# EAGLE board Joystickv-Panel-v03 (EAGLE 7.2.0)
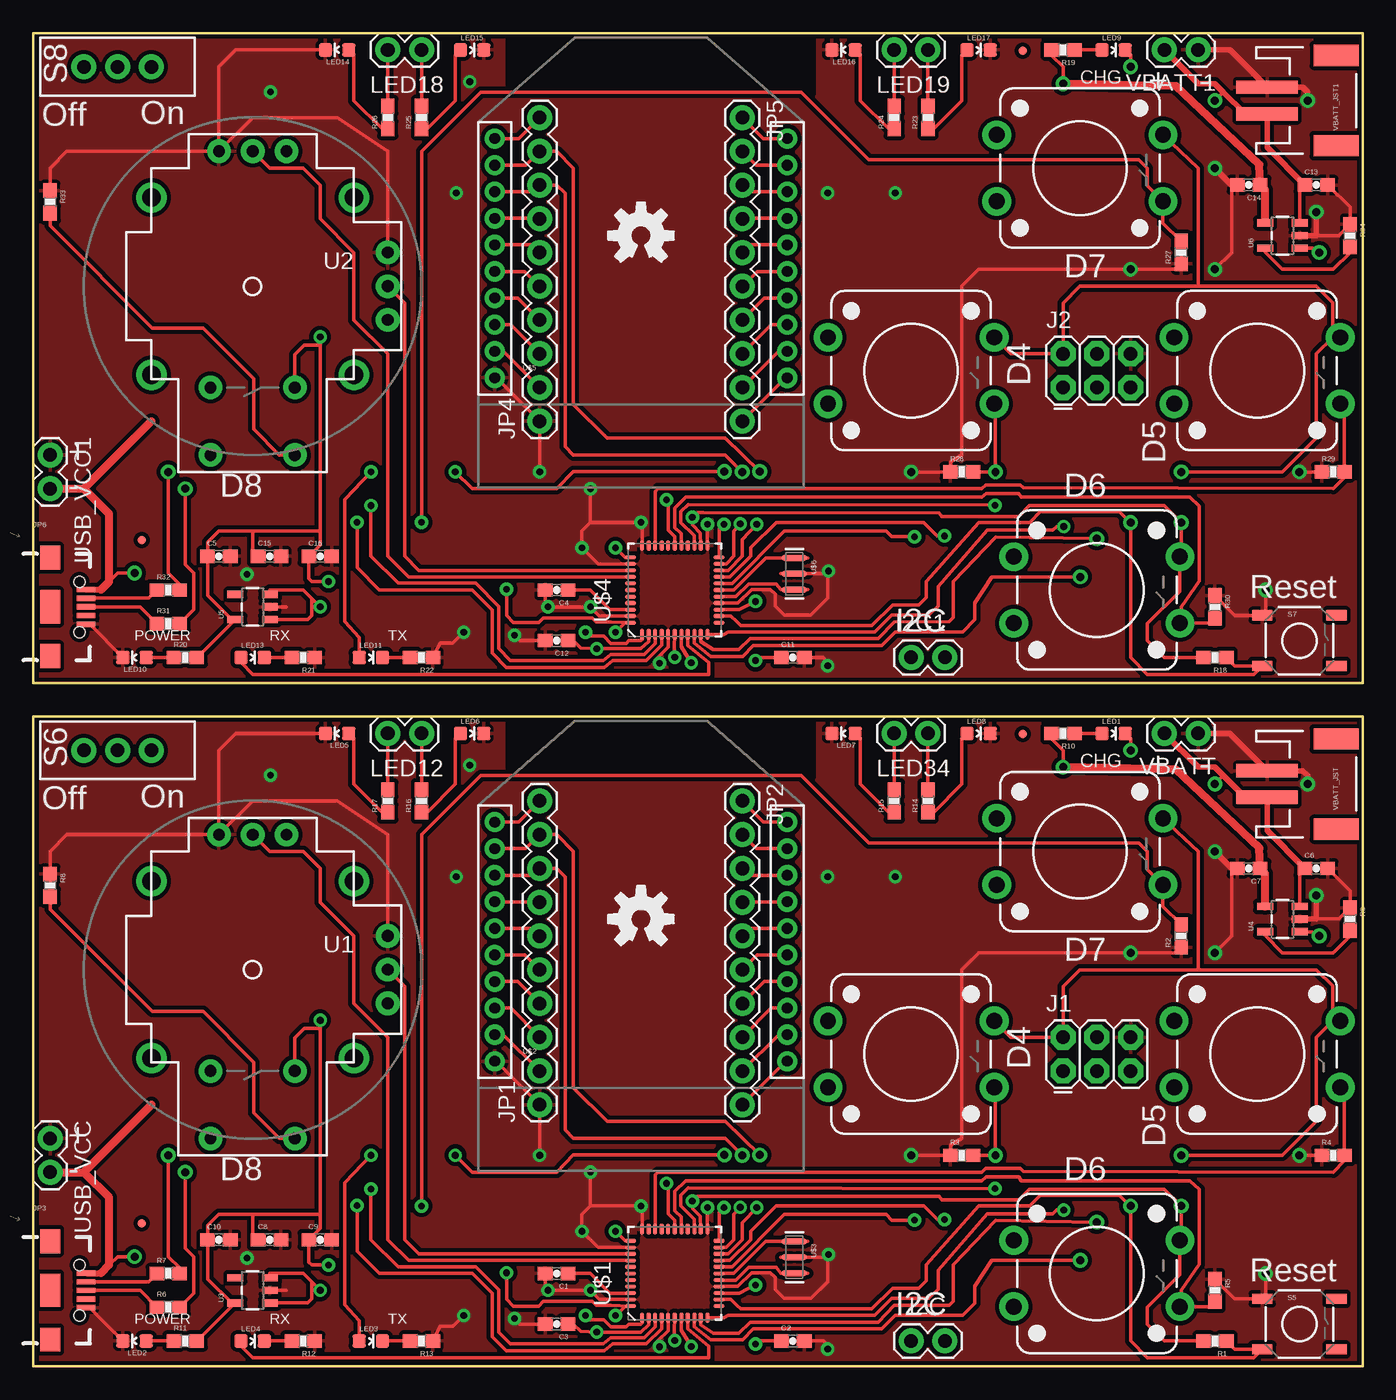
[diagram p0: board, top side]
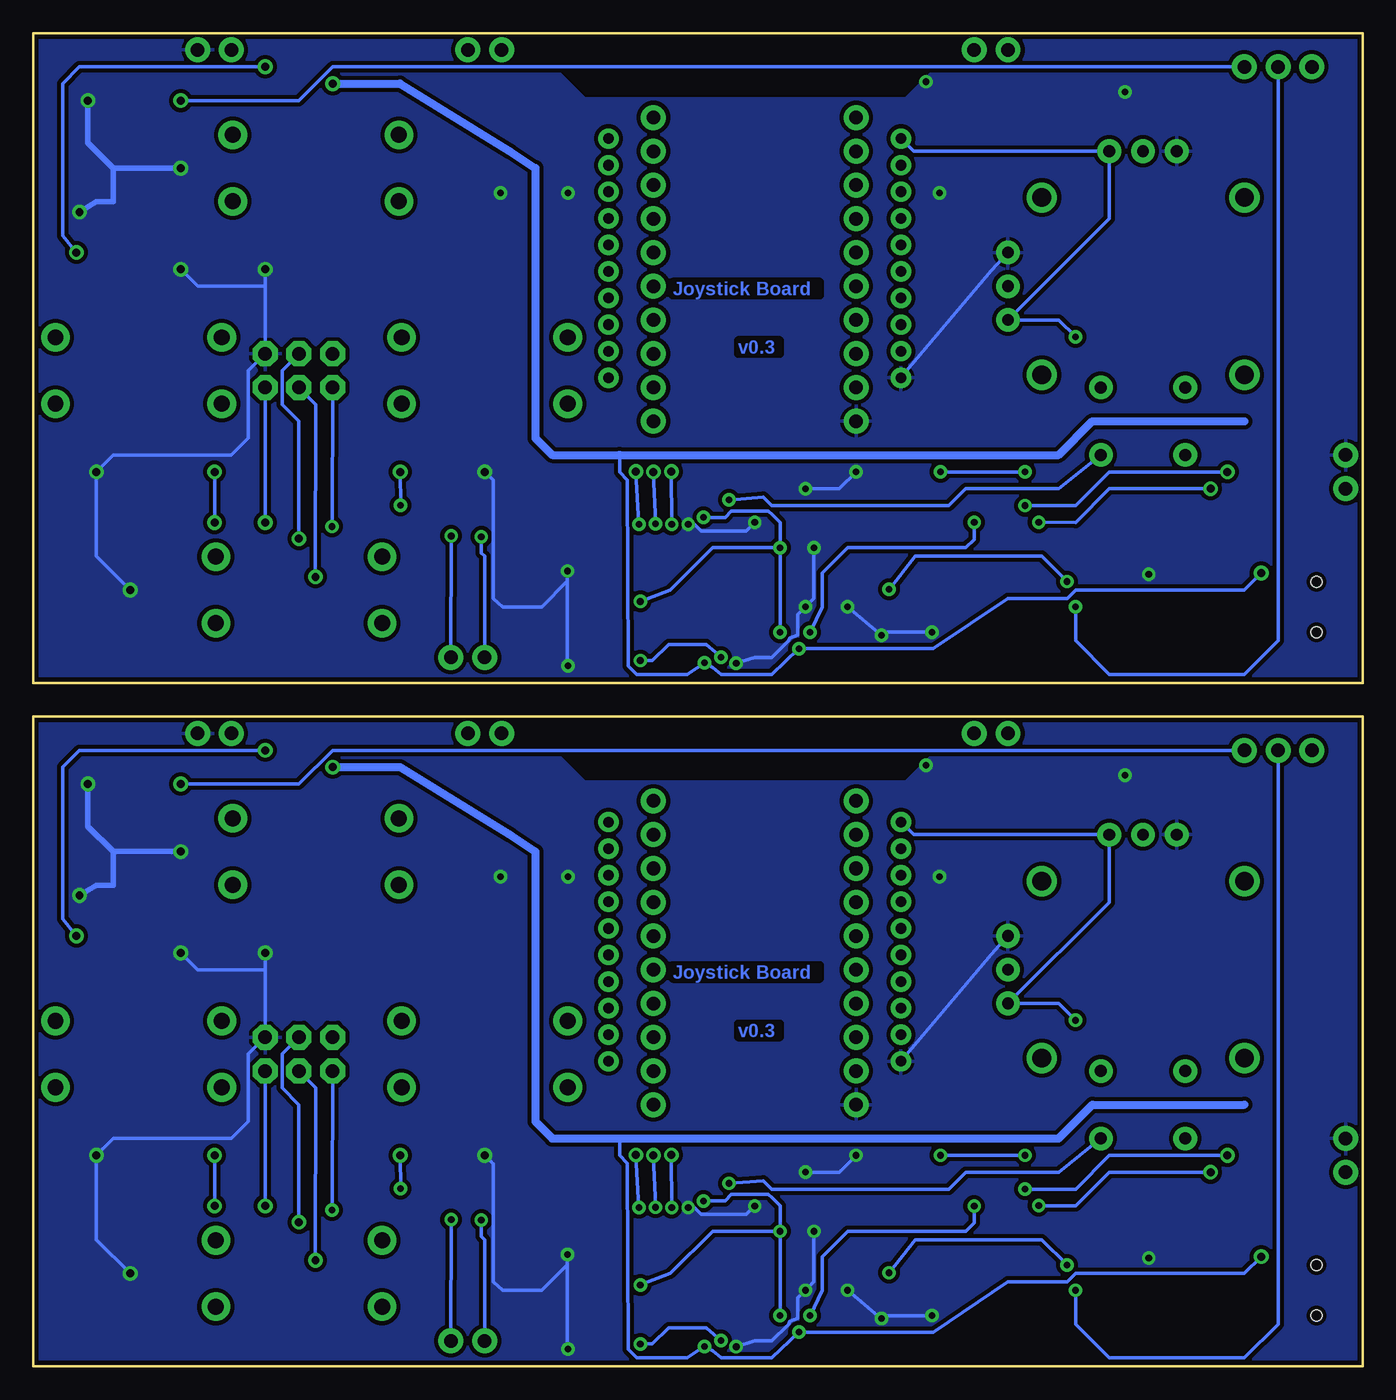
[diagram p1: board, bottom side, seen from below]

Size 100 x 100.32 mm. Coordinates in mm from the lower left corner, seen from the top.
Outline: 0,0 100,0 100,48.89 0,48.89 0,0
Outline: 0,51.44 100,51.44 100,100.32 0,100.32 0,51.44
Copper layers (1*16): Top 0.035mm / dielectric 1.5mm / Bottom 0.035mm
Design rules "SparkFun-2-layer *": minimum track width 7mil, minimum drill 15mil, track to track 6mil, track to pad 8mil, pad to pad 8mil, via to via 8mil, smd to smd 8mil, copper to edge 8mil, drill to drill 8mil, minimum pad ring 12mil, minimum via ring 10mil, stop-mask expansion 4mil, vias tented up to drill 20mil, thermal gap 10mil

## Footprints (pad centres in the part's own frame; a part is rotated, then mirrored left to right if it is on the bottom)
0603-CAP = smd 1.1 x 1: 1 -0.85,0; 2 0.85,0
MICRO-FIDUCIAL = smd 0.635 x 0.635: 1 0,0
1X02 = drill 1.016 pad 1.88: 1 0,0; 2 2.54,0
2X3 = drill 1.016 pad 1.88 octagon: 1 0,0; 2 0,2.54; 3 2.54,0; 4 2.54,2.54; 5 5.08,0; 6 5.08,2.54
1X10 = drill 1.016 pad 1.88: 1 0,0; 2 2.54,0; 3 5.08,0; 4 7.62,0; 5 10.16,0; 6 12.7,0; 7 15.24,0; 8 17.78,0; 9 20.32,0; 10 22.86,0
USB-B-MICRO-SMD_V03 = smd 1.4 x 0.4: D+1 2.7,0; D-1 2.7,0.65; GND1 2.7,-1.3; ID1 2.7,-0.65; VBUS1 2.7,1.3 | smd 1.5 x 1.8: SHIELD1 0,3.7; SHIELD2 0,-3.7 | smd 1.5 x 2.5: SHIELD3 0,0 | hole 0.85: 2.2,1.9; 2.2,-1.9
LED-0603 = smd 1 x 1: A 0,-0.877; C 0,0.877
0603-RES = smd 1.1 x 1: 1 -0.85,0; 2 0.85,0
TACTILE-PTH-12MM = drill 1.2 pad 2.159: 1 6.25,-2.5; 2 -6.25,-2.5; 3 6.25,2.5; 4 -6.25,2.5
TACTILE-SWITCH-SMD = smd 1.524 x 0.762: 1 -2.794,1.905; 2 2.794,1.905; 3 -2.794,-1.905; 4 2.794,-1.905
SWITCH-SPDT = drill 1.016 pad 1.88: 1 0,2.54; 2 0,0; 3 0,-2.54
JOYSTICK = drill 0.9 pad 1.778: B1A -3.175,12.7; B1B 3.175,12.7; B2A -3.175,7.62; B2B 3.175,7.62 | drill 0.889 pad 1.778: H1 -2.54,-10.16; H2 0,-10.16; H3 2.54,-10.16; V1 -10.16,2.54; V2 -10.16,0; V3 -10.16,-2.54 | drill 1.397 pad 2.286: MOUNT1 -7.62,6.668; MOUNT2 -7.62,-6.668; MOUNT3 7.62,-6.668; MOUNT4 7.62,6.668
SOT23-5 = smd 0.55 x 1.2: 1 -0.95,-1.3; 2 0,-1.3; 3 0.95,-1.3; 4 0.95,1.3; 5 -0.95,1.3
QFN-44-NOPAD_1:1-LESS_PASTE = smd 0.8 x 0.3: 1 -3.337,2.458; 2 -3.337,1.958; 3 -3.337,1.479; 4 -3.337,0.979; 5 -3.337,0.5; 6 -3.337,0; 7 -3.337,-0.5; 8 -3.337,-0.979; 9 -3.337,-1.479; 10 -3.337,-1.958; 11 -3.337,-2.458; 23 3.337,-2.458; 24 3.337,-1.958; 25 3.337,-1.479; 26 3.337,-0.979; 27 3.337,-0.5; 28 3.337,0; 29 3.337,0.5; 30 3.337,0.979; 31 3.337,1.479; 32 3.337,1.958; 33 3.337,2.458 | smd 0.3 x 0.8: 12 -2.458,-3.337; 13 -1.958,-3.337; 14 -1.479,-3.337; 15 -0.979,-3.337; 16 -0.5,-3.337; 17 0,-3.337; 18 0.5,-3.337; 19 0.979,-3.337; 20 1.479,-3.337; 21 1.958,-3.337; 22 2.458,-3.337; 34 2.458,3.337; 35 1.958,3.337; 36 1.479,3.337; 37 0.979,3.337; 38 0.5,3.337; 39 0,3.337; 40 -0.5,3.337; 41 -0.979,3.337; 42 -1.479,3.337; 43 -1.958,3.337; 44 -2.458,3.337
XBEE-1 = drill 0.8 pad 1.524: 1 -11,20; 2 -11,18; 3 -11,16; 4 -11,14; 5 -11,12; 6 -11,10; 7 -11,8; 8 -11,6; 9 -11,4; 10 -11,2; 11 11,2; 12 11,4; 13 11,6; 14 11,8; 15 11,10; 16 11,12; 17 11,14; 18 11,16; 19 11,18; 20 11,20
RESONATOR-SMD = smd 0.45 x 1.905: 1 -1.2,0; 2 0,0; 3 1.2,0
JST-2-SMD = smd 1 x 4.6: 1 -1,-3.7; 2 1,-3.7 | smd 1.6 x 3.4: NC1 -3.4,1.5; NC2 3.4,1.5

## Placement (x,y rotation side)
C1  0.1uF  [0603-CAP]  39.37,6.99 180 top
C2  1.0uF  [0603-CAP]  57.15,1.91 0 top
C3  1.0uF  [0603-CAP]  39.37,3.17 180 top
C4  0.1uF  [0603-CAP]  39.37,58.42 180 top
C5  0.1uF  [0603-CAP]  13.97,60.96 0 top
C6  10uF  [0603-CAP]  96.52,37.46 0 top
C7  4.7uF  [0603-CAP]  91.44,37.46 180 top
C8  10uF  [0603-CAP]  17.78,9.52 0 top
C9  1.0uF  [0603-CAP]  21.59,9.52 0 top
C10  0.1uF  [0603-CAP]  13.97,9.52 0 top
C11  1.0uF  [0603-CAP]  57.15,53.34 0 top
C12  1.0uF  [0603-CAP]  39.37,54.61 180 top
C13  10uF  [0603-CAP]  96.52,88.9 0 top
C14  4.7uF  [0603-CAP]  91.44,88.9 180 top
C15  10uF  [0603-CAP]  17.78,60.96 0 top
C16  1.0uF  [0603-CAP]  21.59,60.96 0 top
FID1  FIDUCIALUFIDUCIAL  [MICRO-FIDUCIAL]  8.18,10.74 0 top
FID2  FIDUCIALUFIDUCIAL  [MICRO-FIDUCIAL]  74.42,47.57 0 top
FID3  FIDUCIALUFIDUCIAL  [MICRO-FIDUCIAL]  8.18,62.18 0 top
FID4  FIDUCIALUFIDUCIAL  [MICRO-FIDUCIAL]  74.42,99.01 0 top
I2C  [1X02]  68.58,1.91 180 top
I2C1  [1X02]  68.58,53.34 180 top
J1  AVR_SPI_PRG_6PTH  [2X3]  77.47,22.23 0 top
J2  AVR_SPI_PRG_6PTH  [2X3]  77.47,73.66 0 top
JP1  M10"  [1X10]  38.1,19.69 90 top
JP2  M10"  [1X10]  53.34,42.54 270 top
JP3  USB_MICROB_PLUGCONN-11752  [USB-B-MICRO-SMD_V03]  1.27,5.72 0 top
JP4  M10"  [1X10]  38.1,71.12 90 top
JP5  M10"  [1X10]  53.34,93.98 270 top
JP6  USB_MICROB_PLUGCONN-11752  [USB-B-MICRO-SMD_V03]  1.27,57.15 0 top
LED1  Yellow  [LED-0603]  81.28,47.62 270 top
LED2  RED  [LED-0603]  7.62,1.91 90 top
LED3  Green  [LED-0603]  25.4,1.91 270 top
LED4  Yellow  [LED-0603]  16.51,1.91 270 top
LED5  GREEN  [LED-0603]  22.86,47.62 90 top
LED6  Yellow  [LED-0603]  33.02,47.62 270 top
LED7  RED  [LED-0603]  60.96,47.62 90 top
LED8  BLUE  [LED-0603]  71.12,47.62 270 top
LED9  Yellow  [LED-0603]  81.28,99.06 270 top
LED10  RED  [LED-0603]  7.62,53.34 90 top
LED11  Green  [LED-0603]  25.4,53.34 270 top
LED12  [1X02]  26.67,47.62 0 top
LED13  Yellow  [LED-0603]  16.51,53.34 270 top
LED14  GREEN  [LED-0603]  22.86,99.06 90 top
LED15  Yellow  [LED-0603]  33.02,99.06 270 top
LED16  RED  [LED-0603]  60.96,99.06 90 top
LED17  BLUE  [LED-0603]  71.12,99.06 270 top
LED18  [1X02]  26.67,99.06 0 top
LED19  [1X02]  64.77,99.06 0 top
LED34  [1X02]  64.77,47.62 0 top
LOGO1  OSHW-LOGOM  [OSHW-LOGO-M]  45.72,33.66 0 top
LOGO2  OSHW-LOGOM  [OSHW-LOGO-M]  45.72,85.09 0 top
R1  10K  [0603-RES]  88.9,1.91 180 top
R2  10K  [0603-RES]  86.36,32.38 90 top
R3  10K  [0603-RES]  69.85,15.88 0 top
R4  10K  [0603-RES]  97.79,15.88 0 top
R5  10K  [0603-RES]  88.9,5.72 270 top
R6  22  [0603-RES]  10.16,4.45 0 top
R7  22  [0603-RES]  10.16,6.99 0 top
R8  10K  [0603-RES]  1.27,36.2 270 top
R9  2.0k  [0603-RES]  99.06,33.66 270 top
R10  470  [0603-RES]  77.47,47.62 180 top
R11  470  [0603-RES]  11.43,1.91 0 top
R12  330  [0603-RES]  20.32,1.91 180 top
R13  330  [0603-RES]  29.21,1.91 180 top
R14  330  [0603-RES]  67.31,42.54 90 top
R15  330  [0603-RES]  64.77,42.54 90 top
R16  330  [0603-RES]  29.21,42.54 90 top
R17  330  [0603-RES]  26.67,42.54 90 top
R18  10K  [0603-RES]  88.9,53.34 180 top
R19  470  [0603-RES]  77.47,99.06 180 top
R20  470  [0603-RES]  11.43,53.34 0 top
R21  330  [0603-RES]  20.32,53.34 180 top
R22  330  [0603-RES]  29.21,53.34 180 top
R23  330  [0603-RES]  67.31,93.98 90 top
R24  330  [0603-RES]  64.77,93.98 90 top
R25  330  [0603-RES]  29.21,93.98 90 top
R26  330  [0603-RES]  26.67,93.98 90 top
R27  10K  [0603-RES]  86.36,83.82 90 top
R28  10K  [0603-RES]  69.85,67.31 0 top
R29  10K  [0603-RES]  97.79,67.31 0 top
R30  10K  [0603-RES]  88.9,57.15 270 top
R31  22  [0603-RES]  10.16,55.88 0 top
R32  22  [0603-RES]  10.16,58.42 0 top
R33  10K  [0603-RES]  1.27,87.63 270 top
R34  2.0k  [0603-RES]  99.06,85.09 270 top
S1  SWITCH-MOMENTARY-212MM  [TACTILE-PTH-12MM]  78.74,38.73 0 top
S2  SWITCH-MOMENTARY-212MM  [TACTILE-PTH-12MM]  66.04,23.5 0 top
S3  SWITCH-MOMENTARY-212MM  [TACTILE-PTH-12MM]  92.08,23.5 0 top
S4  SWITCH-MOMENTARY-212MM  [TACTILE-PTH-12MM]  80.01,6.99 0 top
S5  Reset  [TACTILE-SWITCH-SMD]  95.25,3.17 0 top
S6  [SWITCH-SPDT]  6.35,46.35 90 top
S7  Reset  [TACTILE-SWITCH-SMD]  95.25,54.61 0 top
S8  [SWITCH-SPDT]  6.35,97.79 90 top
S9  SWITCH-MOMENTARY-212MM  [TACTILE-PTH-12MM]  78.74,90.17 0 top
S10  SWITCH-MOMENTARY-212MM  [TACTILE-PTH-12MM]  66.04,74.93 0 top
S11  SWITCH-MOMENTARY-212MM  [TACTILE-PTH-12MM]  92.08,74.93 0 top
S12  SWITCH-MOMENTARY-212MM  [TACTILE-PTH-12MM]  80.01,58.42 0 top
U1  JOYSTICKPTH  [JOYSTICK]  16.51,29.85 180 top
U2  JOYSTICKPTH  [JOYSTICK]  16.51,81.28 180 top
U3  V_REG_MIC5219SMD  [SOT23-5]  16.51,5.72 90 top
U4  MCP73831  [SOT23-5]  93.98,33.66 90 top
U5  V_REG_MIC5219SMD  [SOT23-5]  16.51,57.15 90 top
U6  MCP73831  [SOT23-5]  93.98,85.09 90 top
U$1  ATMEGA32U41:1-LESS_PASTE  [QFN-44-NOPAD_1:1-LESS_PASTE]  48.26,6.99 90 top
U$2  XBEE-1B1  [XBEE-1]  45.72,20.96 0 top
U$3  8MHZ  [RESONATOR-SMD]  57.25,8.2 270 top
U$4  ATMEGA32U41:1-LESS_PASTE  [QFN-44-NOPAD_1:1-LESS_PASTE]  48.26,58.42 90 top
U$5  XBEE-1B1  [XBEE-1]  45.72,72.39 0 top
U$6  8MHZ  [RESONATOR-SMD]  57.25,59.64 270 top
USB_VCC  [1X02]  1.27,17.14 270 top
USB_VCC1  [1X02]  1.27,68.58 270 top
VBATT  [1X02]  87.63,47.62 180 top
VBATT1  [1X02]  87.63,99.06 180 top
VBATT_JST  [JST-2-SMD]  96.52,43.81 270 top
VBATT_JST1  [JST-2-SMD]  96.52,95.25 270 top

## Library data of the parts
C1 C4 C5 C10 = SparkFun-Capacitors; PROD_ID: CAP-00810
C2 C3 C9 C11 C12 C16 = SparkFun-Capacitors; PROD_ID: CAP-00868
C6 C8 C13 C15 = SparkFun-Capacitors; PROD_ID: CAP-11015
C7 C14 = SparkFun-Capacitors; PROD_ID: CAP-08280
FID1-FID4 LOGO1 LOGO2 = SparkFun-Aesthetics
I2C I2C1 J1 J2 JP1 JP2 JP4 JP5 LED12 LED18 LED19 LED34 USB_VCC USB_VCC1 VBATT VBATT1 VBATT_JST VBATT_JST1 = SparkFun-Connectors
JP3 JP6 = SparkFun-Connectors; PROD_ID: CONN-11752
LED1 LED4 LED6 LED9 LED13 LED15 = SparkFun-LED; PROD_ID: DIO-09003
LED2 LED7 LED10 LED16 = SparkFun-LED; PROD_ID: DIO-00819
LED3 LED5 LED11 LED14 = SparkFun-LED; PROD_ID: DIO-00821
LED8 LED17 = SparkFun-LED; PROD_ID: DIO-08575
R1-R5 R8 R18 R27-R30 R33 = SparkFun-Resistors; PROD_ID: RES-00824
R6 R7 R31 R32 = SparkFun-Resistors; PROD_ID: RES-08698
R9 R34 = SparkFun-Resistors; PROD_ID: RES-08296
R10 R11 R19 R20 = SparkFun-Resistors; PROD_ID: RES-07869
R12-R17 R21-R26 = SparkFun-Resistors; PROD_ID: RES-00818
S1-S4 S9-S12 = SparkFun-Electromechanical; PROD_ID: SWCH-09185
S5 S7 = SparkFun-Electromechanical; PROD_ID: SWCH-08247
S6 S8 = SparkFun-Electromechanical; PROD_ID: SWCH-08261
U1 U2 = SparkFun-Electromechanical
U3 U5 = SparkFun-PowerIC
U4 U6 = SparkFun-PowerIC; PROD_ID: IC-09995
U$1 U$4 = SparkFun-DigitalIC
U$2 U$5 = SparkFun-RF
U$3 U$6 = SparkFun-FreqCtrl; PROD_ID: XTAL-08895

## Nets
3.3V: C8.1 C9.1 C10.1 J1.2 JP1.10 R1.2 R11.2 S1.3 S2.3 S3.3 S4.3 U1.B2A U1.H1 U1.V1 U3.5 U$1.14 U$1.24 U$1.34 U$1.44 U$2.1
3.3V1: C5.1 C15.1 C16.1 J2.2 JP4.10 R18.2 R20.2 S9.3 S10.3 S11.3 S12.3 U2.B2A U2.H1 U2.V1 U5.5 U$4.14 U$4.24 U$4.34 U$4.44 U$5.1
A0: U1.V2 U$1.36
A1: U1.H2 U$1.37
A2: U2.V2 U$4.36
A3: U2.H2 U$4.37
D1: I2C1.2 U$4.18
D2: I2C.1 U$1.19
D3: I2C.2 U$1.18
D4: R3.2 S2.1 U$1.25
D5: R4.2 S3.1 U$1.31
D6: R5.2 S4.1 U$1.27
D7: R2.2 S1.1 U$1.1
D8: R8.2 U1.B1A U$1.28
D9: U$1.29
D10: U$1.30
D11: R28.2 S10.1 U$4.25
D12: R29.2 S11.1 U$4.31
D13: R30.2 S12.1 U$4.27
D14: I2C1.1 U$4.19
D15: R27.2 S9.1 U$4.1
D16: R33.2 U2.B1A U$4.28
D17: U$4.29
D18: U$4.30
D+: R6.2 U$1.4
D+1: R31.2 U$4.4
D-: R7.2 U$1.3
D-1: R32.2 U$4.3
GND: C1.2 C2.2 C3.2 C6.2 C7.2 C8.2 C9.2 C10.2 J1.6 JP1.1 JP3.GND1 LED2.C LED5.C LED6.C LED7.C LED8.C R2.1 R3.1 R4.1 R5.1 R8.1 R9.1 R12.1 R13.1 S5.1 U1.H3 U1.V3 U3.2 U4.2 U$1.5 U$1.15 U$1.23 U$1.33 U$1.35 U$1.43 U$2.10 U$3.2 USB_VCC.1 VBATT.1 VBATT_JST.1
GND1: C4.2 C5.2 C11.2 C12.2 C13.2 C14.2 C15.2 C16.2 J2.6 JP4.1 JP6.GND1 LED10.C LED14.C LED15.C LED16.C LED17.C R21.1 R22.1 R27.1 R28.1 R29.1 R30.1 R33.1 R34.1 S7.1 U2.H3 U2.V3 U5.2 U6.2 U$4.5 U$4.15 U$4.23 U$4.33 U$4.35 U$4.43 U$5.10 U$6.2 USB_VCC1.1 VBATT1.1 VBATT_JST1.1
MISO: J1.1 U$1.11
MISO1: J2.1 U$4.11
MOSI: J1.4 U$1.10
MOSI1: J2.4 U$4.10
N$1: U$1.17 U$3.1
N$2: C1.1 U$1.42
N$3: JP3.D+1 R6.1
N$4: JP1.2 U$2.9
N$5: C2.1 U$1.6
N$6: U$1.16 U$3.3
N$7: C4.1 U$4.42
N$8: JP1.3 U$2.8
N$9: JP3.D-1 R7.1
N$10: JP1.4 U$2.7
N$11: R9.2 U4.5
N$12: JP1.5 U$2.6
N$13: JP1.6 U$2.5
N$14: JP1.7 U$2.4
N$15: JP2.10 U$2.11
N$16: JP2.9 U$2.12
N$17: JP2.8 U$2.13
N$18: JP2.7 U$2.14
N$19: JP2.6 U$2.15
N$20: JP2.5 U$2.16
N$21: JP2.4 U$2.17
N$22: C11.1 U$4.6
N$23: JP2.3 U$2.18
N$24: JP2.2 U$2.19
N$25: JP2.1 U$2.20
N$26: LED2.A R11.1
N$27: LED1.A R10.1
N$28: LED1.C U4.1
N$29: LED4.A U$1.8
N$30: LED4.C R12.2
N$31: LED3.C R13.2
N$32: LED3.A U$1.22
N$33: LED12.1 R17.2
N$34: LED8.A R14.1
N$35: LED7.A R15.1
N$36: LED6.A R16.1
N$37: LED5.A R17.1
N$38: LED12.2 R16.2
N$39: LED34.1 R15.2
N$40: LED34.2 R14.2
N$41: R34.2 U6.5
N$42: JP4.2 U$5.9
N$43: JP4.3 U$5.8
N$44: JP4.4 U$5.7
N$45: JP4.5 U$5.6
N$46: JP4.6 U$5.5
N$47: JP4.7 U$5.4
N$48: JP5.10 U$5.11
N$49: JP5.9 U$5.12
N$50: JP5.8 U$5.13
N$51: JP5.7 U$5.14
N$52: JP5.6 U$5.15
N$53: JP5.5 U$5.16
N$54: JP5.4 U$5.17
N$55: JP5.3 U$5.18
N$56: JP5.2 U$5.19
N$57: JP5.1 U$5.20
N$58: LED9.A R19.1
N$59: LED9.C U6.1
N$60: LED10.A R20.1
N$61: LED13.A U$4.8
N$62: LED13.C R21.2
N$63: LED11.C R22.2
N$64: LED11.A U$4.22
N$65: LED15.A R25.1
N$66: LED14.A R26.1
N$67: LED18.1 R26.2
N$68: LED18.2 R25.2
N$69: LED19.1 R24.2
N$70: LED19.2 R23.2
N$71: LED17.A R23.1
N$72: LED16.A R24.1
N$73: JP6.D+1 R31.1
N$74: JP6.D-1 R32.1
N$75: U$4.17 U$6.1
N$76: U$4.16 U$6.3
RESET: J1.5 R1.1 S5.3 U$1.13
RESET1: J2.5 R18.1 S7.3 U$4.13
RX: JP1.9 U$1.20 U$2.2
RX1: JP4.9 U$4.20 U$5.2
SCK: J1.3 U$1.9
SCK1: J2.3 U$4.9
TX: JP1.8 U$1.21 U$2.3
TX1: JP4.8 U$4.21 U$5.3
USB_VCC: C3.1 C7.1 JP3.VBUS1 R10.2 U4.4 U$1.2 U$1.7 USB_VCC.2
USB_VCC1: C12.1 C14.1 JP6.VBUS1 R19.2 U6.4 U$4.2 U$4.7 USB_VCC1.2
VBATT: C6.1 S6.3 U4.3 VBATT.2 VBATT_JST.2
VBATT1: C13.1 S8.3 U6.3 VBATT1.2 VBATT_JST1.2
VIN: S6.2 U3.1 U3.3
VIN1: S8.2 U5.1 U5.3

## Tracks (layer width: path | path; a pad name or v marks a point on that pad's centre or on a via)
3.3V  (via drill 0.5, 0.6)
  Top 0.254: U$1.14 53.13,5.51 v54.33,6.12 | v35.61,7.04 35.61,5.05 36.12,4.52 38.02,4.53 38.37,4.88 42.04,4.88 42.34,4.57 43.43,4.57 U$1.44 44.53,4.53 v43.82,3.81 | v22.23,7.62 20.96,7.62 20.74,7.84 C9.1 21.59,10.38 21.59,11.43 | S2.3 73.52,24.77 J1.2 77.47,28.58 78.74,29.85 87.63,29.85 | v86.36,15.88 93.98,15.88 96.52,18.42 96.52,24.77 97.75,26 | R1.2 85.09,1.91 83.82,3.18 83.82,4.45 86.26,6.89 S4.3 86.3,9.53 86.36,9.53 v86.36,12.07 85.09,13.34 74.93,13.34 74.14,12.52 68.35,12.52 68.17,12.78 50.42,12.8 49.94,12.8 v49.58,12.45 49.61,12.42 49.61,11.86 50.19,11.28 U$1.24 | R11.2 12.35,1.91 U3.5 14.92,4.77 13.12,6.57 C10.1 13.13,10.59 13.97,11.43 16.51,11.43 | U$2.1 36.51,40.96 JP1.10 | v21.59,26.04 21.59,25.43 | 21.59,25.43 21.59,11.43 | 87.63,29.85 96.52,29.85 97.75,28.62 97.75,26 | S1.3 87.63,38.74 87.63,29.85 | 16.51,11.43 21.59,11.43 | C8.1 16.51,9.53 16.51,11.43 | U$1.34 44.53,9.44 v43.82,10.16 | S3.3 97.75,26 | U1.B2A 19.69,24.71 20.4,25.43 21.59,25.43
  Bottom 0.254: v35.61,7.04 33.66,9.53 24.13,9.53 v22.23,7.62 | v86.36,12.07 v86.36,15.88 | U$2.1 33.77,40.01 U1.H1 19.05,34.93 U1.V1 22.86,27.31 v21.59,26.04 | v43.82,3.81 v43.82,10.16 | v49.58,12.45 47.96,12.45 47.47,12.93 44.7,12.93 44.68,12.9 44.45,12.7 43.82,12.07 v43.82,10.16 | v54.33,6.12 52.07,6.99 48.9,10.16 v43.82,10.16
3.3V1  (via drill 0.5, 0.6)
  Top 0.254: U$4.14 53.13,56.94 v54.33,57.56 | v35.61,58.47 35.61,56.49 36.12,55.96 38.02,55.96 38.37,56.31 42.04,56.31 42.34,56.01 43.43,56.01 U$4.44 44.53,55.96 v43.82,55.25 | v22.23,59.06 20.96,59.06 20.74,59.27 C16.1 21.59,61.81 21.59,62.87 | S10.3 73.52,76.2 J2.2 77.47,80.01 78.74,81.28 87.63,81.28 | v86.36,67.31 93.98,67.31 96.52,69.85 96.52,76.2 97.75,77.43 | R18.2 85.09,53.34 83.82,54.61 83.82,55.88 86.26,58.32 S12.3 86.3,60.96 86.36,60.96 v86.36,63.5 85.09,64.77 74.93,64.77 74.14,63.96 68.35,63.96 68.17,64.21 50.42,64.24 49.94,64.24 v49.58,63.88 49.61,63.86 49.61,63.3 50.19,62.71 U$4.24 | R20.2 12.35,53.34 U5.5 14.92,56.2 13.12,58 C5.1 13.13,62.03 13.97,62.87 16.51,62.87 | U$5.1 36.51,92.39 JP4.10 | v21.59,77.47 21.59,76.86 | 21.59,76.86 21.59,62.87 | 87.63,81.28 96.52,81.28 97.75,80.05 97.75,77.43 | S9.3 87.63,90.17 87.63,81.28 | 16.51,62.87 21.59,62.87 | C15.1 16.51,60.96 16.51,62.87 | U$4.34 44.53,60.88 v43.82,61.6 | S11.3 97.75,77.43 | U2.B2A 19.69,76.15 20.4,76.86 21.59,76.86
  Bottom 0.254: v35.61,58.47 33.66,60.96 24.13,60.96 v22.23,59.06 | v86.36,63.5 v86.36,67.31 | U$5.1 33.77,91.44 U2.H1 19.05,86.36 U2.V1 22.86,78.74 v21.59,77.47 | v43.82,55.25 v43.82,61.6 | v49.58,63.88 47.96,63.88 47.47,64.36 44.7,64.36 44.68,64.34 44.45,64.14 43.82,63.5 v43.82,61.6 | v54.33,57.56 52.07,58.42 48.9,61.6 v43.82,61.6
A0
  Top 0.254: U$1.36 29,8.46 27.94,9.53 27.94,28.58 U1.V2
A1
  Top 0.254: U$1.37 28.23,7.96 26.67,9.53 26.67,24.77 24.13,27.31 24.13,32.39 21.59,34.93 21.59,37.47 20.32,38.74 17.78,38.74 U1.H2
A2
  Top 0.254: U$4.36 29,59.9 27.94,60.96 27.94,80.01 U2.V2
A3
  Top 0.254: U$4.37 28.23,59.4 26.67,60.96 26.67,76.2 24.13,78.74 24.13,83.82 21.59,86.36 21.59,88.9 20.32,90.17 17.78,90.17 U2.H2
D1  (via drill 0.5)
  Top 0.254: U$4.18 52.57,58.92 56.52,62.87 64.16,62.87 64.59,62.43 v66.29,62.43
  Bottom 0.254: v66.29,62.43 66.29,61.21 66.04,60.96 I2C1.2
D2  (via drill 0.5)
  Top 0.254: U$1.19 52.41,7.96 53.98,9.53 53.98,10.16 55.88,12.07 66.98,12.07 68,11.05 v68.55,11.05
  Bottom 0.254: v68.55,11.05 I2C.1
D3  (via drill 0.5)
  Top 0.254: U$1.18 52.57,7.49 56.52,11.43 64.16,11.43 64.59,11 v66.29,11
  Bottom 0.254: v66.29,11 66.29,9.78 66.04,9.53 I2C.2
D4  (via drill 0.5, 0.6)
  Top 0.254: v72.36,13.36 49.28,13.41 48.72,12.88 48.72,12.07 49.72,11.07 49.74,11.07 U$1.25 | R3.2 v72.39,15.88 72.39,20.88 S2.1
  Bottom 0.254: v72.36,13.36 v72.39,15.88
D5
  Top 0.254: U$1.31 46.78,14.4 46.99,14.61 71.37,14.61 71.65,14.88 74.27,14.88 74.47,14.68 97.79,14.61 98.64,15.46 R4.2 98.64,20.68 S3.1
D6
  Top 0.254: U$1.27 48.76,11.23 48.26,11.68 48.25,13.15 49.07,13.97 71.35,13.97 71.7,14.25 74.14,14.25 74.35,13.97 87,13.97 87.73,13.31 87.73,7.67 86.36,5.72 86.36,4.59 S4.1 88.52,4.49 R5.2
D7  (via drill 0.5)
  Top 0.254: U$1.1 45.8,3.26 45.72,3.18 44.81,3.18 44.6,2.97 43.43,2.97 42.9,3.51 41.83,3.51 v41.55,3.81 | v29.21,12.07 29.21,40.01 33.66,44.45 57.79,44.45 62.87,39.37 83.19,39.37 83.82,38.74 83.82,37.41 S1.1 84.99,34.61 R2.2
  Bottom 0.254: v41.55,3.81 40.64,5.72 40.64,8.26 38.74,10.16 29.85,10.16 29.21,10.8 v29.21,12.07
D8  (via drill 0.5)
  Top 0.254: U$1.28 48.26,11 47.78,11.48 47.78,13.51 47.8,13.54 v47.65,13.77 | R8.2 1.27,34.39 8.97,26.7 12.78,26.7 16.59,22.89 16.59,19.08 18.52,17.15 U1.B1A
  Bottom 0.254: v47.65,13.77 45.09,13.97 44.45,13.34 31.12,13.34 29.85,14.61 22.86,14.61 U1.B1A
D11  (via drill 0.5, 0.6)
  Top 0.254: v72.36,64.8 49.28,64.85 48.72,64.32 48.72,63.5 49.72,62.5 49.74,62.5 U$4.25 | R28.2 v72.39,67.31 72.39,72.31 S10.1
  Bottom 0.254: v72.36,64.8 v72.39,67.31
D12
  Top 0.254: U$4.31 46.78,65.83 46.99,66.04 71.37,66.04 71.65,66.32 74.27,66.32 74.47,66.12 97.79,66.04 98.64,66.89 R29.2 98.64,72.11 S11.1
D13
  Top 0.254: U$4.27 48.76,62.67 48.26,63.12 48.25,64.58 49.07,65.41 71.35,65.41 71.7,65.68 74.14,65.68 74.35,65.41 87,65.41 87.73,64.74 87.73,59.11 86.36,57.15 86.36,56.02 S12.1 88.52,55.92 R30.2
D14  (via drill 0.5)
  Top 0.254: U$4.19 52.41,59.4 53.98,60.96 53.98,61.6 55.88,63.5 66.98,63.5 68,62.48 v68.55,62.48
  Bottom 0.254: v68.55,62.48 I2C1.1
D15  (via drill 0.5)
  Top 0.254: U$4.1 45.8,54.69 45.72,54.61 44.81,54.61 44.6,54.41 43.43,54.41 42.9,54.94 41.83,54.94 v41.55,55.25 | v29.21,63.5 29.21,91.44 33.66,95.89 57.79,95.89 62.87,90.81 83.19,90.81 83.82,90.17 83.82,88.84 S9.1 84.99,86.04 R27.2
  Bottom 0.254: v41.55,55.25 40.64,57.15 40.64,59.69 38.74,61.6 29.85,61.6 29.21,62.23 v29.21,63.5
D16  (via drill 0.5)
  Top 0.254: U$4.28 48.26,62.43 47.78,62.92 47.78,64.95 47.8,64.97 v47.65,65.2 | R33.2 1.27,85.83 8.97,78.13 12.78,78.13 16.59,74.32 16.59,70.51 18.52,68.58 U2.B1A
  Bottom 0.254: v47.65,65.2 45.09,65.41 44.45,64.77 31.12,64.77 29.85,66.04 22.86,66.04 U2.B1A
D+  (via drill 0.5, 0.6)
  Top 0.254: U$1.4 47.28,2.83 46.13,1.68 43.59,1.68 42.95,1.17 35.59,1.17 34.52,2.24 34.52,5.49 33.02,6.99 26.04,6.99 24.36,8.66 v24.36,12.09 | v11.43,14.61 11.43,8.89 12.07,8.26 12.07,5.5 R6.2
  Bottom 0.254: v24.36,12.09 21.59,12.07 19.05,14.61 v11.43,14.61
D+1  (via drill 0.5, 0.6)
  Top 0.254: U$4.4 47.28,54.27 46.13,53.11 43.59,53.11 42.95,52.6 35.59,52.6 34.52,53.67 34.52,56.92 33.02,58.42 26.04,58.42 24.36,60.1 v24.36,63.53 | v11.43,66.04 11.43,60.33 12.07,59.69 12.07,56.94 R31.2
  Bottom 0.254: v24.36,63.53 21.59,63.5 19.05,66.04 v11.43,66.04
D-  (via drill 0.5, 0.6)
  Top 0.254: U$1.3 46.78,2.97 45.97,2.13 43.46,2.13 42.88,1.68 35.89,1.68 35.03,2.57 35.03,5.74 33.27,7.49 27.46,7.49 25.4,9.53 v25.4,13.34 | R7.2 11.01,7.41 10.16,8.26 v10.16,15.88
  Bottom 0.254: v25.4,13.34 21.59,13.34 19.05,15.88 v10.16,15.88
D-1  (via drill 0.5, 0.6)
  Top 0.254: U$4.3 46.78,54.4 45.97,53.57 43.46,53.57 42.88,53.11 35.89,53.11 35.03,54 35.03,57.18 33.27,58.93 27.46,58.93 25.4,60.96 v25.4,64.77 | R32.2 11.01,58.84 10.16,59.69 v10.16,67.31
  Bottom 0.254: v25.4,64.77 21.59,64.77 19.05,67.31 v10.16,67.31
GND  (via drill 0.5, 0.6)
  Top 0.254: U$1.43 42.6,5.03 v41.91,5.72 v38.74,5.72 38.52,5.93 C1.2 | U$1.15 53,6.01 54.05,7.04 55.45,7.04 55.83,6.68 55.83,5.79 56.52,5.11 58.5,5.11 59.77,6.38 59.77,7.85 v59.82,8.41 59.61,8.2 58.27,8.2 | U$1.5 47.76,2.68 46.99,1.91 46.99,1.52 v47.12,1.47 | C2.2 59.44,1.91 59.77,1.57 v59.77,1.3 | R4.1 v95.25,15.88 | v92.71,6.99 92.71,5.33 S5.1 90.39,5.08 R5.1 | LED2.C 4.23,4.42 JP3.GND1 | U$2.10 34.83,22.96 JP1.1 v38.1,15.88 | 96.52,33.66 98.21,33.66 R9.1 99.06,35.79 C6.2 | U3.2 19.05,5.72 | 41.91,12.07 v45.72,12.07 45.8,11.98 U$1.33 | 41.91,12.07 41.28,11.43 v41.28,10.16 42.49,8.94 U$1.35 | 41.91,12.07 v41.91,14.61 | U$1.23 v50.72,11.94 | v66.04,15.88 R3.1 69.01,16.66 69.85,17.15 69.85,29.85 71.12,31.12 v82.55,31.12 85.93,31.12 R2.1 | v32.39,3.81 31.57,3 30.61,3 R13.1 | 90.17,37.47 90.17,32.39 v88.9,31.12 | LED5.C 15.24,47.63 13.97,46.36 U1.H3 | U1.H3 2.54,40.01 1.27,38.74 R8.1 | U1.H3 16.51,42.55 22.86,42.55 26.67,40.01 U1.V3 | C3.2 36.6,3.18 v36.2,3.58
  Top 0.406: VBATT.1 90.01,47.63 VBATT_JST.1 95.52,44.82 95.89,44.45 v95.89,43.82 | v88.9,38.74 90.17,37.47 C7.2 | U4.2 96.52,33.66 v96.52,35.43
  Bottom 0.254: v47.12,1.47 45.72,1.91 44.45,1.91 43.18,3.18 43.08,3.38 42.49,3.61 42.47,5.16 v41.91,5.72 41.28,6.35 v41.28,10.16 | v92.71,6.99 95.25,9.53 v95.25,15.88 93.98,17.15 85.09,17.15 83.82,18.42 83.82,23.5 J1.6 82.55,29.85 | v41.91,14.61 39.37,14.61 v38.1,15.88 | v50.72,11.94 50.24,11.91 49.76,11.43 46.36,11.43 v45.72,12.07 | v66.04,15.88 65.41,15.24 65.41,6.35 64.69,5.72 61.75,5.72 59.82,7.65 | v32.39,3.81 35.97,3.81 v36.2,3.58 v38.74,5.72 | 82.55,29.85 v82.55,31.12 | v88.9,31.12 87.63,29.85 82.55,29.85 | U1.V3 27.94,31.01 U$2.10 | v59.82,8.41 59.82,7.65 | 59.82,7.65 59.82,1.35 v59.77,1.3
  Bottom 0.406: v95.89,43.82 95.89,40.64 93.98,38.74 | 93.98,38.74 v88.9,38.74 | v96.52,35.43 95.25,36.2 93.98,36.2 93.98,38.74
  other vias: 64.85,36.86 59.77,36.86 31.83,36.86 17.86,44.48 16.08,8.15 32.84,45.24
  pour Top (isolate 0.305): -0.08,0.33 100.25,0.33 100.33,48.89 59.77,49.05 59,48.79 59,44.22 58.75,43.97 35.38,43.97 35.38,49.05 29.69,48.89 0,48.89
  pour Bottom (isolate 0.305): -0.08,0.33 100.25,0.33 100.33,48.89 63.32,48.79 58.5,43.97 34.37,43.97 29.44,48.89 0,48.89
GND1  (via drill 0.5, 0.6)
  Top 0.254: U$4.43 42.6,56.46 v41.91,57.15 v38.74,57.15 38.52,57.37 C4.2 | U$4.15 53,57.44 54.05,58.47 55.45,58.47 55.83,58.12 55.83,57.23 56.52,56.54 58.5,56.54 59.77,57.81 59.77,59.28 v59.82,59.84 59.61,59.64 58.27,59.64 | U$4.5 47.76,54.11 46.99,53.34 46.99,52.96 v47.12,52.91 | C11.2 59.44,53.34 59.77,53.01 v59.77,52.73 | R29.1 v95.25,67.31 | v92.71,58.42 92.71,56.77 S7.1 90.39,56.52 R30.1 | LED10.C 4.23,55.85 JP6.GND1 | U$5.10 34.83,74.39 JP4.1 v38.1,67.31 | 96.52,85.09 98.21,85.09 R34.1 99.06,87.22 C13.2 | U5.2 19.05,57.15 | 41.91,63.5 v45.72,63.5 45.8,63.42 U$4.33 | 41.91,63.5 41.28,62.87 v41.28,61.6 42.49,60.38 U$4.35 | 41.91,63.5 v41.91,66.04 | U$4.23 v50.72,63.37 | v66.04,67.31 R28.1 69.01,68.1 69.85,68.58 69.85,81.28 71.12,82.55 v82.55,82.55 85.93,82.55 R27.1 | v32.39,55.25 31.57,54.43 30.61,54.43 R22.1 | 90.17,88.9 90.17,83.82 v88.9,82.55 | LED14.C 15.24,99.06 13.97,97.79 U2.H3 | U2.H3 2.54,91.44 1.27,90.17 R33.1 | U2.H3 16.51,93.98 22.86,93.98 26.67,91.44 U2.V3 | C12.2 36.6,54.61 v36.2,55.02
  Top 0.406: VBATT1.1 90.01,99.06 VBATT_JST1.1 95.52,96.25 95.89,95.89 v95.89,95.25 | v88.9,90.17 90.17,88.9 C14.2 | U6.2 96.52,85.09 v96.52,86.87
  Bottom 0.254: v47.12,52.91 45.72,53.34 44.45,53.34 43.18,54.61 43.08,54.81 42.49,55.04 42.47,56.59 v41.91,57.15 41.28,57.79 v41.28,61.6 | v92.71,58.42 95.25,60.96 v95.25,67.31 93.98,68.58 85.09,68.58 83.82,69.85 83.82,74.93 J2.6 82.55,81.28 | v41.91,66.04 39.37,66.04 v38.1,67.31 | v50.72,63.37 50.24,63.35 49.76,62.87 46.36,62.87 v45.72,63.5 | v66.04,67.31 65.41,66.68 65.41,57.79 64.69,57.15 61.75,57.15 59.82,59.08 | v32.39,55.25 35.97,55.25 v36.2,55.02 v38.74,57.15 | 82.55,81.28 v82.55,82.55 | v88.9,82.55 87.63,81.28 82.55,81.28 | U2.V3 27.94,82.44 U$5.10 | v59.82,59.84 59.82,59.08 | 59.82,59.08 59.82,52.78 v59.77,52.73
  Bottom 0.406: v95.89,95.25 95.89,92.08 93.98,90.17 | 93.98,90.17 v88.9,90.17 | v96.52,86.87 95.25,87.63 93.98,87.63 93.98,90.17
  other vias: 64.85,88.29 59.77,88.29 31.83,88.29 17.86,95.91 16.08,59.59 32.84,96.67
  pour Top (isolate 0.305): -0.08,51.77 100.25,51.77 100.33,100.33 59.77,100.48 59,100.23 59,95.66 58.75,95.4 35.38,95.4 35.38,100.48 29.69,100.33 0,100.33
  pour Bottom (isolate 0.305): -0.08,51.77 100.25,51.77 100.33,100.33 63.32,100.23 58.5,95.4 34.37,95.4 29.44,100.33 0,100.33
MISO  (via drill 0.5)
  Top 0.254: U$1.11 51.93,3.65 52.3,3.84 63.32,3.84 64.59,5.11 67.39,5.11 68.07,5.79 68.07,7.24 71.76,11.48 76.71,11.48 76.99,11.76 v77.52,11.76
  Bottom 0.254: v77.52,11.76 J1.1
MISO1  (via drill 0.5)
  Top 0.254: U$4.11 51.93,55.08 52.3,55.27 63.32,55.27 64.59,56.54 67.39,56.54 68.07,57.23 68.07,58.67 71.76,62.92 76.71,62.92 76.99,63.2 v77.52,63.2
  Bottom 0.254: v77.52,63.2 J2.1
MOSI  (via drill 0.6)
  Top 0.254: U$1.10 50.22,3.12 51.16,2.49 53.06,2.49 53.92,3.33 63.58,3.33 64.77,4.57 68.91,4.6 69.22,4.9 69.22,7.62 72.42,10.97 v80.01,10.85
  Bottom 0.254: v80.01,10.85 80.01,19.69 81.28,20.96 81.28,23.5 J1.4
MOSI1  (via drill 0.6)
  Top 0.254: U$4.10 50.22,54.56 51.16,53.92 53.06,53.92 53.92,54.76 63.58,54.76 64.77,56.01 68.91,56.03 69.22,56.34 69.22,59.06 72.42,62.41 v80.01,62.28
  Bottom 0.254: v80.01,62.28 80.01,71.12 81.28,72.39 81.28,74.93 J2.4
N$1
  Top 0.254: U$1.17 52.71,6.99 55.09,9.4 55.44,9.4 56.24,9.4
N$2
  Top 0.254: U$1.42 43.39,5.51 41.91,6.99 C1.1
N$3
  Top 0.254: JP3.D+1 8.04,5.72 R6.1
N$4
  Top 0.254: U$2.9 35.37,24.96 JP1.2
N$5  (via drill 0.5)
  Top 0.254: U$1.6 48.18,1.8 v48.26,1.93 | v54.33,1.68 54.38,1.68 54.61,1.91 C2.1
  Bottom 0.254: v48.26,1.93 49.35,2.9 52.2,2.9 53.42,1.68 v54.33,1.68
N$6
  Top 0.254: U$1.16 52.84,6.49 53.82,7.44 55.9,7.44 56.24,7
N$7
  Top 0.254: U$4.42 43.39,56.94 41.91,58.42 C4.1
N$8
  Top 0.254: U$2.8 35.91,26.96 JP1.3
N$9
  Top 0.254: JP3.D-1 8.69,6.37 R7.1
N$10
  Top 0.254: U$2.7 36.45,28.96 JP1.4
N$11
  Top 0.254: R9.2 99.06,32.39 97.79,31.12 93.98,31.12 92.68,32.42 U4.5
N$12
  Top 0.254: U$2.6 36.99,30.96 JP1.5
N$13
  Top 0.254: U$2.5 37.53,32.96 JP1.6
N$14
  Top 0.254: U$2.4 38.07,34.96 JP1.7
N$15
  Top 0.254: U$2.11 56.61,22.96 JP2.10
N$16
  Top 0.254: U$2.12 56.07,24.96 JP2.9
N$17
  Top 0.254: U$2.13 55.53,26.96 JP2.8
N$18
  Top 0.254: U$2.14 54.99,28.96 JP2.7
N$19
  Top 0.254: U$2.15 54.45,30.96 JP2.6
N$20
  Top 0.254: U$2.16 53.91,32.96 JP2.5
N$21
  Top 0.254: U$2.17 53.37,34.96 JP2.4
N$22  (via drill 0.5)
  Top 0.254: U$4.6 48.18,53.24 v48.26,53.37 | v54.33,53.11 54.38,53.11 54.61,53.34 C11.1
  Bottom 0.254: v48.26,53.37 49.35,54.33 52.2,54.33 53.42,53.11 v54.33,53.11
N$23
  Top 0.254: U$2.18 53.85,36.96 JP2.3
N$24
  Top 0.254: U$2.19 54.39,38.96 JP2.2
N$25
  Top 0.254: U$2.20 54.93,40.96 JP2.1
N$26
  Top 0.254: LED2.A R11.1
N$27
  Top 0.254: R10.1 LED1.A
N$28  (via drill 0.6)
  Top 0.254: U4.1 96.2,32.71 v96.75,32.39 | v82.55,46.36 82.55,47.23 LED1.C
  Bottom 0.254: v96.75,32.39 97.79,33.66 97.79,45.09 96.52,46.36 v82.55,46.36
N$29
  Top 0.254: U$1.8 49.24,2.81 50.8,1.52 50.8,0.64 16.51,0.64 15.63,1.51 LED4.A
N$30
  Top 0.254: LED4.C R12.2
N$31
  Top 0.254: R13.2 LED3.C
N$32  (via drill 0.5, 0.6)
  Top 0.254: U$1.22 51.6,11.59 v51.97,11.94 | v51.99,15.9 40.64,15.9 39.37,14.61 33.02,14.61 v31.75,15.88 | v25.4,15.88 23.44,13.79 23.44,4.62 24.52,3.42 LED3.A
  Bottom 0.254: v51.97,11.94 v51.99,15.9 | v31.75,15.88 v25.4,15.88
N$33
  Top 0.254: R17.2 LED12.1
N$34
  Top 0.254: R14.1 67.73,41.7 69.85,43.82 69.85,47.23 LED8.A
N$35
  Top 0.254: R15.1 64.35,41.7 62.23,43.82 62.23,47.23 LED7.A
N$36
  Top 0.254: R16.1 29.63,41.7 31.75,43.82 31.75,47.23 LED6.A
N$37
  Top 0.254: R17.1 26.25,41.7 24.13,43.82 24.13,47.23 LED5.A
N$38
  Top 0.254: R16.2 LED12.2
N$39
  Top 0.254: R15.2 LED34.1
N$40
  Top 0.254: R14.2 LED34.2
N$41
  Top 0.254: R34.2 99.06,83.82 97.79,82.55 93.98,82.55 92.68,83.85 U6.5
N$42
  Top 0.254: U$5.9 35.37,76.39 JP4.2
N$43
  Top 0.254: U$5.8 35.91,78.39 JP4.3
N$44
  Top 0.254: U$5.7 36.45,80.39 JP4.4
N$45
  Top 0.254: U$5.6 36.99,82.39 JP4.5
N$46
  Top 0.254: U$5.5 37.53,84.39 JP4.6
N$47
  Top 0.254: U$5.4 38.07,86.39 JP4.7
N$48
  Top 0.254: U$5.11 56.61,74.39 JP5.10
N$49
  Top 0.254: U$5.12 56.07,76.39 JP5.9
N$50
  Top 0.254: U$5.13 55.53,78.39 JP5.8
N$51
  Top 0.254: U$5.14 54.99,80.39 JP5.7
N$52
  Top 0.254: U$5.15 54.45,82.39 JP5.6
N$53
  Top 0.254: U$5.16 53.91,84.39 JP5.5
N$54
  Top 0.254: U$5.17 53.37,86.39 JP5.4
N$55
  Top 0.254: U$5.18 53.85,88.39 JP5.3
N$56
  Top 0.254: U$5.19 54.39,90.39 JP5.2
N$57
  Top 0.254: U$5.20 54.93,92.39 JP5.1
N$58
  Top 0.254: R19.1 LED9.A
N$59  (via drill 0.6)
  Top 0.254: U6.1 96.2,84.14 v96.75,83.82 | v82.55,97.79 82.55,98.67 LED9.C
  Bottom 0.254: v96.75,83.82 97.79,85.09 97.79,96.52 96.52,97.79 v82.55,97.79
N$60
  Top 0.254: LED10.A R20.1
N$61
  Top 0.254: U$4.8 49.24,54.24 50.8,52.96 50.8,52.07 16.51,52.07 15.63,52.95 LED13.A
N$62
  Top 0.254: LED13.C R21.2
N$63
  Top 0.254: R22.2 LED11.C
N$64  (via drill 0.5, 0.6)
  Top 0.254: U$4.22 51.6,63.03 v51.97,63.37 | v51.99,67.34 40.64,67.34 39.37,66.04 33.02,66.04 v31.75,67.31 | v25.4,67.31 23.44,65.23 23.44,56.06 24.52,54.85 LED11.A
  Bottom 0.254: v51.97,63.37 v51.99,67.34 | v31.75,67.31 v25.4,67.31
N$65
  Top 0.254: R25.1 29.63,93.13 31.75,95.25 31.75,98.67 LED15.A
N$66
  Top 0.254: R26.1 26.25,93.13 24.13,95.25 24.13,98.67 LED14.A
N$67
  Top 0.254: R26.2 LED18.1
N$68
  Top 0.254: R25.2 LED18.2
N$69
  Top 0.254: R24.2 LED19.1
N$70
  Top 0.254: R23.2 LED19.2
N$71
  Top 0.254: R23.1 67.73,93.13 69.85,95.25 69.85,98.67 LED17.A
N$72
  Top 0.254: R24.1 64.35,93.13 62.23,95.25 62.23,98.67 LED16.A
N$73
  Top 0.254: JP6.D+1 8.04,57.15 R31.1
N$74
  Top 0.254: JP6.D-1 8.69,57.8 R32.1
N$75
  Top 0.254: U$4.17 52.71,58.42 55.09,60.83 55.44,60.84 56.24,60.84
N$76
  Top 0.254: U$4.16 52.84,57.92 53.82,58.88 55.9,58.88 56.24,58.44
RESET  (via drill 0.6)
  Top 0.254: U$1.13 52.48,5.03 52.91,4.6 53.21,4.32 55.12,4.32 63.09,4.32 64.64,5.87 66.62,5.87 67.18,6.43 67.18,7.62 71.12,12.07 74.96,12.07 75.77,12.88 81.71,12.88 82.19,12.4 v82.55,12.07 82.55,1.91 83.82,0.64 91.82,0.64 S5.3 90.39,1.27 R1.1
  Bottom 0.254: v82.55,12.07 J1.5
RESET1  (via drill 0.6)
  Top 0.254: U$4.13 52.48,56.46 52.91,56.03 53.21,55.75 55.12,55.75 63.09,55.75 64.64,57.3 66.62,57.3 67.18,57.86 67.18,59.06 71.12,63.5 74.96,63.5 75.77,64.31 81.71,64.31 82.19,63.83 v82.55,63.5 82.55,53.34 83.82,52.07 91.82,52.07 S7.3 90.39,52.71 R18.1
  Bottom 0.254: v82.55,63.5 J2.5
RX  (via drill 0.5, 0.6)
  Top 0.254: U$1.20 52.28,8.46 53.34,9.53 53.34,10.8 v54.43,11.94 | v54.66,15.9 52.07,18.42 43.18,18.42 40.64,20.96 40.64,38.74 39.37,40.01 JP1.9 37.05,38.96 U$2.2
  Bottom 0.254: v54.43,11.94 v54.66,15.9
RX1  (via drill 0.5, 0.6)
  Top 0.254: U$4.20 52.28,59.9 53.34,60.96 53.34,62.23 v54.43,63.37 | v54.66,67.34 52.07,69.85 43.18,69.85 40.64,72.39 40.64,90.17 39.37,91.44 JP4.9 37.05,90.39 U$5.2
  Bottom 0.254: v54.43,63.37 v54.66,67.34
SCK  (via drill 0.6)
  Top 0.254: U$1.9 49.74,2.99 50.95,1.98 53.39,1.98 54.18,2.82 63.83,2.82 64.85,3.84 69.93,3.84 70.84,4.75 70.84,6.02 72.11,7.98 v78.77,7.98
  Bottom 0.254: v78.77,7.98 78.74,20.96 J1.3
SCK1  (via drill 0.6)
  Top 0.254: U$4.9 49.74,54.43 50.95,53.42 53.39,53.42 54.18,54.25 63.83,54.25 64.85,55.27 69.93,55.27 70.84,56.18 70.84,57.45 72.11,59.41 v78.77,59.41
  Bottom 0.254: v78.77,59.41 78.74,72.39 J2.3
TX  (via drill 0.5, 0.6)
  Top 0.254: U$1.21 52.12,8.94 52.71,9.53 52.71,11.43 v53.19,11.96 | v53.34,15.88 52.07,17.15 40.64,17.15 40.01,17.78 40.01,36.83 39.37,37.47 JP1.8 37.59,36.96 U$2.3
  Bottom 0.254: v53.19,11.96 v53.34,15.88
TX1  (via drill 0.5, 0.6)
  Top 0.254: U$4.21 52.12,60.38 52.71,60.96 52.71,62.87 v53.19,63.4 | v53.34,67.31 52.07,68.58 40.64,68.58 40.01,69.22 40.01,88.27 39.37,88.9 JP4.8 37.59,88.39 U$5.3
  Bottom 0.254: v53.19,63.4 v53.34,67.31
USB_VCC  (via drill 0.5, 0.6)
  Top 0.254: U$1.2 46.3,3.12 45.72,2.57 v42.39,2.57 41.2,2.62 40.64,3.18 C3.1 | U$1.7 48.76,2.73 v49.5,1.5 | 92.68,37.08 C7.1 | R10.2 76.62,47.21 77.47,46.36 v77.47,45.09 | v7.62,8.26 6.35,8.26 5.72,7.62
  Top 0.457: JP3.VBUS1 5.11,7.02
  Top 0.61: USB_VCC.2 3.81,14.61 | 3.81,14.61 5.72,12.7 5.72,7.62 5.11,7.02 | U4.4 92.68,37.08 | C7.1 92.24,39 85.95,44.91 v77.47,45.09 | 8.89,19.69 3.81,14.61
  Bottom 0.254: v7.62,8.26 8.89,6.99 21.59,6.99 22.23,6.35 26.67,6.35 32.28,2.57 v42.39,2.57 44.45,0.64 48.26,0.64 48.87,1.17 v49.5,1.5 50.8,0.64 54.61,0.64 55.25,1.27 55.3,15.27 55.88,15.88 55.88,17.15
  Bottom 0.61: v77.47,45.09 72.39,45.09 64.14,40.01 62.23,38.74 62.23,18.42 60.96,17.15 55.88,17.15 22.86,17.15 20.32,19.69 8.89,19.69
USB_VCC1  (via drill 0.5, 0.6)
  Top 0.254: U$4.2 46.3,54.56 45.72,54 v42.39,54 41.2,54.05 40.64,54.61 C12.1 | U$4.7 48.76,54.16 v49.5,52.93 | 92.68,88.51 C14.1 | R19.2 76.62,98.64 77.47,97.79 v77.47,96.52 | v7.62,59.69 6.35,59.69 5.72,59.06
  Top 0.457: JP6.VBUS1 5.11,58.45
  Top 0.61: USB_VCC1.2 3.81,66.04 | 3.81,66.04 5.72,64.14 5.72,59.06 5.11,58.45 | U6.4 92.68,88.51 | C14.1 92.24,90.44 85.95,96.34 v77.47,96.52 | 8.89,71.12 3.81,66.04
  Bottom 0.254: v7.62,59.69 8.89,58.42 21.59,58.42 22.23,57.79 26.67,57.79 32.28,54 v42.39,54 44.45,52.07 48.26,52.07 48.87,52.6 v49.5,52.93 50.8,52.07 54.61,52.07 55.25,52.71 55.3,66.7 55.88,67.31 55.88,68.58
  Bottom 0.61: v77.47,96.52 72.39,96.52 64.14,91.44 62.23,90.17 62.23,69.85 60.96,68.58 55.88,68.58 22.86,68.58 20.32,71.12 8.89,71.12
VBATT  (via drill 0.6)
  Top 0.254: U4.3 95.28,37.08 C6.1 | v88.9,43.82 89.54,44.45
  Top 0.406: VBATT.2 87.63,45.09 88.9,45.09 89.54,44.45 91.17,42.82 VBATT_JST.2 92.82,40.32 C6.1
  Bottom 0.254: S6.3 77.47,46.36 80.01,43.82 v88.9,43.82
VBATT1  (via drill 0.6)
  Top 0.254: U6.3 95.28,88.51 C13.1 | v88.9,95.25 89.54,95.89
  Top 0.406: VBATT1.2 87.63,96.52 88.9,96.52 89.54,95.89 91.17,94.25 VBATT_JST1.2 92.82,91.75 C13.1
  Bottom 0.254: S8.3 77.47,97.79 80.01,95.25 v88.9,95.25
VIN  (via drill 0.5)
  Top 0.254: U3.3 17.81,6.95 17.78,6.99 20.32,6.99 20.96,6.35 | 20.96,6.35 20.96,5.08 20.64,4.77 U3.1 | 20.96,6.35 v21.59,5.72
  Bottom 0.254: v21.59,5.72 21.59,3.18 19.05,0.64 8.89,0.64 6.35,3.18 S6.2
VIN1  (via drill 0.5)
  Top 0.254: U5.3 17.81,58.39 17.78,58.42 20.32,58.42 20.96,57.79 | 20.96,57.79 20.96,56.52 20.64,56.2 U5.1 | 20.96,57.79 v21.59,57.15
  Bottom 0.254: v21.59,57.15 21.59,54.61 19.05,52.07 8.89,52.07 6.35,54.61 S8.2

## Text on the board
Bottom: Joystick Board | v0.3 | Joystick Board | v0.3
tPlace: CHG | + | - | On | Off | D7 | D4 | + | D5 | - | D8 | D6 | Reset | POWER | RX | TX | I2C | CHG | On | + | - | Off | D7 | D4 | + | D5 | - | D8 | D6 | Reset | I2C | POWER | RX | TX